# Altium PCB MainBoard.PcbDoc (part 2 of 2)
Units mm, origin at the board's own origin, x right, y up, seen from the top; angles counter-clockwise.
Board outline 250 x 90 mm, 2 copper layers (Top Layer, Bottom Layer); 239 components, 149 nets, 765 pads, 496 vias.
Unrouted connection lines stored in the file: 4.
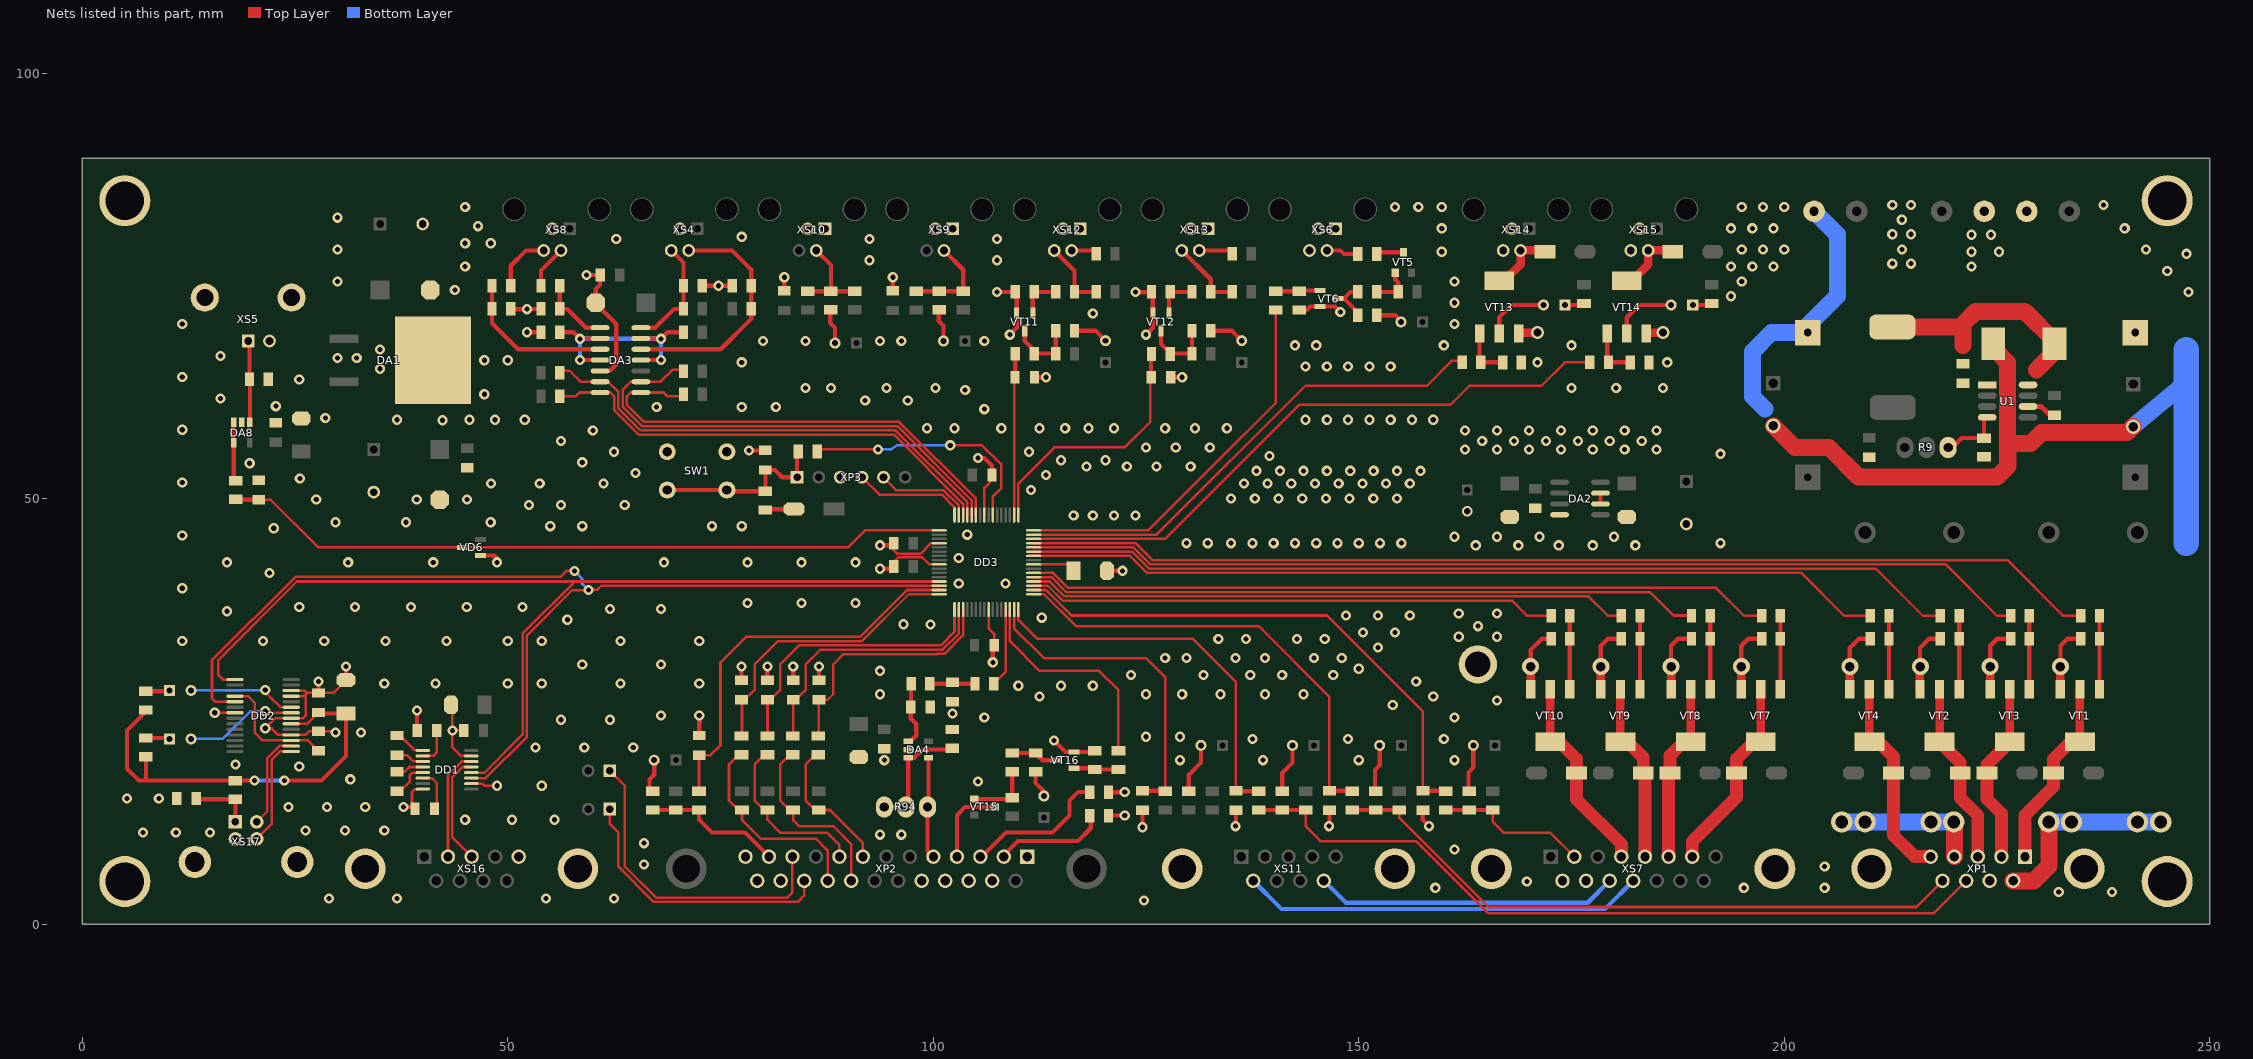
[diagram p2: the nets of this part, all layers, seen from the top]

## Via types
v1: diameter 1.2, hole 0.6, Top Layer to Bottom Layer, 463 vias
v2: diameter 2, hole 1.1, Top Layer to Bottom Layer, 19 vias
v3: diameter 2.5, hole 1.5, Top Layer to Bottom Layer, 9 vias
v4: diameter 1.5, hole 0.9, Top Layer to Bottom Layer, 2 vias
v5: diameter 1.2, hole 0.711, Top Layer to Bottom Layer, 2 vias
v6: diameter 1.5, hole 0.8, Top Layer to Bottom Layer, 1 vias

## Nets (pads, with @x,y where several pads share a name; then routed paths per layer and width w, separated by ;. In a path a pad name is that pad's centre, name@x,y a point inside that pad or via, vN(x,y) a via of type N, cw(c..) or ccw(c..) an arc to the next point about the centre after c; other vN are vias at no path point) (continued)
GND: C1.2 C3.1 C4.2 C5.2 C6.2 C7.1 C8.1 C9.2 C10.1 C11.1 C12.2 C13.2 C14.1 C15.1 C16.2 C17.1 C18.2 C19.1 C20.1 C21.1 C22.1 C23.1 C24.1 C25.1 C26.1 C27.1 C29.1 C30.1 C32.1 C33.1 C34.1 C35.1 C36.1 C37.1 C38.1 C39.1 C40.1 C41.1 C42.1 C43.1 C44.2 C45.1 C46.1 C47.1 C48.1 C49.1 C50.1 C51.1 C52.1 C53.1 DA1.4 DA2.4 DA3.12 DA4.2 DA8.2 DD1.8 DD1.10 DD1.15 DD2.7 DD2.18 DD2.21 DD2.25 DD2.26 DD3.9 DD3.20 DD3.25 DD3.41 pad.1 pad.2@5.001,5.002 pad.3 pad.4 pad.6 R6.2 R12.1 R13.2 R20.2 R22.1 R24.1 R26.1 R28.1 R37.2 R38.2 R39.2 R51.2 R53.1 R55.1 R57.1 R59.1 R74.1 R75.1 R78.1 R79.1 R87.2 R92.2 R93.2 R95.2 SW1.1 SW1.3 U1.6 VD1.2 VD6.1 VT1.3 VT2.3 VT3.3 VT4.3 VT6.2 VT7.3 VT8.3 VT9.3 VT10.3 VT11.2 VT12.2 VT13.3 VT14.3 VT16.2 XP1.7 XP1.10 XP1.11 XP2.1 XP2.13 XP2.15 XP2.16 XP2.17 XP2.18 XP2.24 XP2.25 XP3.3 XS1.2 XS2.1 XS3.2 XS4.3 XS5.2 XS6.1 XS6.3 XS6.4 XS7.9 XS7.10 XS7.16 XS7.17 XS8.3 XS9.1 XS9.3 XS10.1 XS10.3 XS11.10 XS11.11 XS12.1 XS12.3 XS13.1 XS13.3 XS14.3 XS14.4 XS15.3 XS15.4 XS16.5 XS16.10 XS16.11 XS17.4 XS17.5 XS17.6 | length 364.6
  Top Layer w0.3: v1(15.576,24.827) DD2.7@17.951,24.827 ; v1@21.251,23.002 22.001,23.002 22.251,23.002 23.026,22.227 DD2.18@24.551,22.227 26.226,22.227 26.651,22.652 C53.1@27.751,22.652 29.601,22.652 v1(29.751,22.502) ; v1(21.501,23.002) 22.676,24.177 DD2.21@24.551,24.177 25.926,24.177 26.251,24.502 26.251,26.937 26.467,27.152 C50.1@27.751,27.152 ; DD2.25@24.551,26.777 26.026,26.777 26.401,27.152 ; DD2.26@24.551,27.427 26.126,27.427 26.401,27.152 ; C50.1@27.376,26.777 C50.1@27.751,27.152 ; C51.1@31.001,28.652 29.501,27.152 C50.1@27.751,27.152 ; C41.1@39.351,13.752 38.751,14.352 38.751,15.502 39.101,15.852 DD1.8@40.026,15.852 ; C32.1@43.501,25.352 v1(43.501,22.752) ; C29.1@44.851,22.752 v1(43.501,22.752) ; DD1.15@45.726,19.752 44.501,19.752 43.501,20.752 v1(43.501,22.752) ; 46.751,16.502 DD1.10@45.726,16.502 47.001,16.502 47.251,16.252 v1(48.751,16.252) ; C39.1@95.351,41.752 95.351,42.552 95.901,43.102 98.706,43.102 99.556,42.252 DD3.25@100.701,42.252 ; C37.1@95.351,44.752 95.351,43.952 95.801,43.502 98.493,43.502 99.743,44.752 DD3.20@100.701,44.752 ; DD3.9@106.001,48.052 106.001,51.252 107.151,52.402 C40.1@106.901,52.752 ; DD3.41@106.501,36.952 106.501,34.752 107.151,34.102 C38.1@107.151,32.752 ; 26.401,27.152 C50.1@27.751,27.152
  Top Layer w0.5: C50.1@27.751,27.152 v1(27.751,28.502) ; C51.1@31.001,28.652 v1(31.001,30.252) ; v1(37.751,13.752) 37.835,13.669 37.917,13.669 38.001,13.752 C41.1@39.351,13.752 ; C30.1@39.351,23.002 v1(39.351,25.102) ; VD6.1@46.801,43.302 48.451,43.302 v1@48.751,43.002 ; R37.2@50.351,72.28 50.378,72.252 v1(52.251,72.252) 52.223,72.28 R51.2@53.901,72.28 R51.2@53.888,72.267 ; v1(52.251,69.542) R13.2@53.901,69.542 ; v1(59.251,76.252) C20.1@60.851,76.252 60.851,75.102 60.351,74.602 C3.1@60.351,73.017 ; C3.1@60.351,73.217 C3.1@60.351,73.017 ; DA3.12@60.851,64.997 61.981,64.997 62.751,65.767 62.751,70.502 60.351,72.902 C3.1@60.351,73.017 ; C52.1@72.501,22.152 v1(72.501,24.502) ; R6.2@72.751,75.117 R6.2@72.851,75.017 R20.2@76.401,75.017 R20.2@76.501,75.117 ; C49.1@77.476,28.652 v1(77.476,30.252) ; v1(78.351,55.652) C44.2@80.251,55.652 ; C48.1@80.509,28.652 v1(80.509,30.252) ; C24.1@82.501,74.402 v1(82.501,76.002) ; C47.1@83.543,28.652 v1(83.543,30.252) ; C46.1@86.576,28.652 v1(86.576,30.252) ; v1(93.751,41.752) C39.1@95.351,41.752 ; v1(93.751,44.502) C37.1@95.601,44.502 ; C39.1@95.101,41.752 C39.1@95.351,41.752 ; C25.1@95.251,74.402 v1(95.251,76.002) ; v1(105.251,54.752) 106.001,54.752 106.901,53.852 C40.1@106.901,52.752 ; v1(107.001,30.752) 107.001,32.602 C38.1@107.151,32.752 ; v1(107.501,74.252) 107.526,74.277 R74.1@109.651,74.277 109.801,74.127 VT11.2@109.801,71.802 109.801,70.052 v1(109.001,69.252) ; C26.1@111.901,64.252 v1(113.251,64.252) ; v1(114.203,21.55) 115.551,20.202 VT16.2@116.551,20.202 118.826,20.202 R87.2@118.976,20.352 ; C36.1@120.401,41.502 v1(122.251,41.502) ; R92.2@120.601,12.727 120.626,12.752 v1(122.501,12.752) ; R93.2@120.601,15.477 122.476,15.477 v1(122.501,15.502) ; v1(123.751,74.252) 125.626,74.252 R75.1@125.651,74.277 125.801,74.127 VT12.2@125.801,71.802 125.801,70.052 v1(125.001,69.252) ; C33.1@124.576,13.352 124.576,11.402 v1(124.601,11.377) ; C27.1@127.901,64.252 v1(129.251,64.252) ; v1(135.501,11.502) 135.563,11.564 C8.1@135.563,13.352 ; R39.2@143.026,72.152 143.901,72.152 144.301,72.552 VT6.2@145.451,72.552 147.201,72.552 v1(147.835,71.918) ; v1(146.501,11.502) 146.549,11.551 C7.1@146.549,13.352 ; C23.1@157.536,13.352 157.536,12.217 v1(158.251,11.502) ; v2(170.201,30.252) 170.201,32.202 171.526,33.527 R59.1@172.601,33.527 ; v2(178.451,30.252) 178.451,32.702 179.276,33.527 R57.1@180.851,33.527 ; v2(186.701,30.252) 186.701,32.702 187.526,33.527 R55.1@189.101,33.527 ; v2(194.951,30.252) 194.951,32.702 195.776,33.527 R53.1@197.351,33.527 ; VT4.3@207.701,27.602 VT4.3@207.751,27.652 ; v2(207.701,30.252) 207.701,32.452 208.776,33.527 R28.1@210.101,33.527 ; VT2.3@215.951,27.602 VT2.3@216.001,27.652 ; v2@215.951,30.202 215.951,32.452 217.026,33.527 R24.1@218.351,33.527 ; v2(224.201,30.252) 224.201,32.702 225.026,33.527 R26.1@226.601,33.527 ; v2(232.451,30.252) 232.451,32.702 233.276,33.527 R22.1@234.851,33.527
  Top Layer w0.6: U1.6@228.651,60.817 230.186,60.817 231.201,59.802 C4.2@231.751,59.802
  Top Layer w1: VT13.3@168.801,69.402 168.901,69.502 v4(171.001,69.502) ; VT10.3@170.201,27.602 v2(170.201,30.252) ; VT9.3@178.451,27.602 v2(178.451,30.252) ; XS15.4@181.971,79.147 XS15.4@181.971,79.182 ; VT14.3@183.801,69.402 183.901,69.502 v4(185.751,69.502) ; VT8.3@186.701,27.602 v2(186.701,30.252) ; VT7.3@194.951,27.602 v2(194.951,30.252) ; VT4.3@207.701,27.602 v2(207.701,30.252) ; VT2.3@215.951,27.602 215.951,30.202 v2(216.001,30.252) ; VT3.3@224.201,27.602 v2(224.201,30.252) ; VT1.3@232.451,27.602 v2(232.451,30.252)
  Top Layer w2: C5.2@198.721,58.535 201.254,56.002 205.251,56.002 208.751,52.502 224.501,52.502 225.001,52.502 226.313,53.815 226.313,56.44 228.938,56.44 230.251,57.752 240.301,57.752 C1.2@241.001,58.452 ; VD1.2@224.751,67.502 226.251,66.002 226.251,54.252
  Bottom Layer w0.3: v1@15.501,24.752 v1(15.576,24.827)
  Bottom Layer w0.5: v1@37.751,13.502 v1(37.751,13.752) ; v1(39.351,25.102) v1@39.501,25.252 ; v1@78.251,55.752 v1(78.351,55.652)
  Bottom Layer w2: 197.751,60.502 196.251,62.002 196.251,67.252 198.501,69.502 pad.3@202.751,69.502 202.342,69.911 202.501,70.07 206.251,73.82 206.251,81.002 XS3.2@203.501,83.752 ; C1.2@241.001,58.452 247.251,63.702
  Bottom Layer w3: 247.251,44.752 247.251,63.702 247.251,67.502
  other v1: 124.751,2.752 29.001,3.002 37.001,3.002 54.501,3.002 62.501,3.002 232.251,3.752 238.501,3.752 159.001,4.252 195.251,4.252 204.751,4.252 169.751,5.002 204.751,6.752 66.001,7.002 161.251,8.752 66.001,9.502 93.751,10.502 96.251,10.502 7.137,10.752 11.001,10.752 15.001,10.752 26.251,11.002 30.876,11.002 35.501,11.002 45.001,12.252 50.501,12.252 55.501,12.252 24.251,13.752 28.751,13.752 33.251,13.752 5.251,14.752 9.001,14.752 54.001,16.252 105.251,16.752 31.501,17.002 25.501,18.502 18.001,18.752 94.251,19.252 129.001,19.252 138.751,19.252 150.001,19.252 161.251,19.252 53.251,20.752 59.001,20.752 64.751,20.752 137.501,21.752 148.751,21.752 160.001,21.752 125.001,22.002 129.001,22.002 32.751,22.502 56.251,24.002 62.001,24.002 106.001,24.252 161.251,24.252 68.001,24.502 102.251,24.752 154.001,25.752 166.251,26.252 112.501,26.752 158.751,26.752 93.751,27.002 125.001,27.002 129.251,27.002 133.751,27.002 139.001,27.002 143.501,27.002 110.001,28.002 115.001,28.002 118.751,28.002 35.501,28.252 41.501,28.252 50.001,28.252 54.001,28.252 63.251,28.252 72.501,28.252 156.751,28.502 123.251,29.252 131.751,29.252 137.251,29.252 141.001,29.252 147.001,29.252 93.751,29.752 150.001,30.002 58.751,30.502 68.001,30.502 127.251,31.252 129.751,31.252 135.501,31.252 139.001,31.252 144.751,31.252 148.001,31.252 152.251,32.502 11.751,33.252 21.251,33.252 28.438,33.252 35.626,33.252 42.813,33.252 50.001,33.252 54.001,33.252 63.251,33.252 72.501,33.252 133.501,33.502 136.751,33.502 142.751,33.502 146.001,33.502 161.751,33.752 166.251,33.752 150.501,34.252 154.251,34.252 164.001,35.002 99.67,35.204 96.52,35.23 57.001,35.752 112.751,36.002 148.501,36.252 152.251,36.252 156.001,36.252 161.751,36.502 166.251,36.502 17.001,36.752 62.001,37.002 68.001,37.002 25.501,37.252 32.063,37.252 38.626,37.252 45.188,37.252 51.751,37.252 78.188,37.719 84.522,37.719 90.856,37.719 11.751,39.461 103.001,40.002 108.501,40.002 22.001,41.252 17.001,42.502 31.251,42.502 41.251,42.502 48.751,42.502 68.376,42.502 78.188,42.502 84.522,42.502 90.856,42.502 103.001,43.002 163.751,44.502 168.751,44.502 173.501,44.502 177.501,44.502 182.501,44.502 129.751,44.752 132.251,44.752 135.001,44.752 137.501,44.752 140.001,44.752 142.501,44.752 145.001,44.752 147.501,44.752 150.001,44.752 152.501,44.752 155.001,44.752 192.501,44.752 161.251,45.502 166.251,45.502 171.251,45.502 180.001,45.502 11.751,45.669 104.001,45.752 22.501,46.502 55.001,46.752 58.751,46.752 74.001,46.752 77.501,46.752 29.76,47.212 38.04,47.212 47.997,47.212 116.501,48.002 118.751,48.002 121.251,48.002 123.751,48.002 52.501,49.252 56.251,49.252 63.751,49.252 27.501,49.879 39.31,49.879 45.228,49.879 135.001,50.002 137.787,50.002 140.572,50.002 143.358,50.002 146.144,50.002 148.93,50.002 151.715,50.002 154.501,50.002 111.501,51.002 48.048,51.752 53.751,51.752 61.251,51.752 136.501,51.752 139.287,51.752 142.072,51.752 144.858,51.752 147.644,51.752 150.43,51.752 153.215,51.752 156.001,51.752 11.751,51.877 25.569,52.368 113.251,52.752 65.001,53.002 138.001,53.252 140.751,53.252 143.501,53.252 146.251,53.252 149.001,53.252 151.751,53.252 154.501,53.252 157.251,53.252 118.001,53.752 122.751,53.752 126.251,53.752 130.251,53.752 19.676,54.146 58.751,54.252 115.001,54.502 120.251,54.502 139.501,55.002 192.501,55.252 62.501,55.502 111.251,55.502 162.501,55.752 166.251,55.752 170.001,55.752 173.751,55.752 177.501,55.752 181.251,55.752 185.001,55.752 125.001,56.002 128.501,56.002 132.501,56.002 56.251,56.752 164.501,56.752 168.251,56.752 172.001,56.752 175.751,56.752 179.501,56.752 183.251,56.752 60.001,58.002 162.501,58.002 166.251,58.002 170.001,58.002 173.751,58.002 177.501,58.002 181.251,58.002 185.001,58.002 11.751,58.086 99.251,58.252 102.501,58.252 108.001,58.252 112.501,58.252 115.501,58.252 118.251,58.252 121.251,58.252 127.251,58.252 130.751,58.252 134.501,58.252 42.333,59.201 37.001,59.252 45.501,59.252 48.501,59.252 52.001,59.252 143.751,59.252 146.251,59.252 148.751,59.252 151.251,59.252 153.751,59.252 156.251,59.252 158.751,59.252 28.566,59.455 106.001,60.502 67.501,60.752 77.501,60.752 81.501,60.752 22.749,60.852 92.001,61.502 97.001,61.502 16.251,61.752 47.251,62.252 103.751,62.752 85.001,63.002 88.001,63.002 94.501,63.002 100.251,63.002 175.001,63.002 180.251,63.002 185.751,63.002 25.501,64.002 11.751,64.294 35.001,65.252 143.751,65.502 146.251,65.502 148.751,65.502 151.251,65.502 153.751,65.502 77.501,66.002 171.001,66.002 186.251,66.002 47.251,66.252 50.001,66.252 30.001,66.502 32.251,66.502 16.251,66.752 35.001,67.502 142.501,68.002 145.001,68.002 160.001,68.002 175.001,68.002 80.001,68.502 85.001,68.502 93.751,68.502 96.251,68.502 106.001,68.502 11.751,70.502 161.251,70.502 118.751,71.752 161.251,73.002 193.751,73.767 247.501,74.252 43.781,74.492 74.751,75.002 30.001,75.502 161.251,75.502 195.001,75.502 245.001,76.752 45.001,77.252 193.751,77.252 196.251,77.252 198.751,77.252 222.001,77.252 212.7,77.597 214.884,77.597 92.501,78.002 107.501,78.002 247.251,78.752 159.751,79.002 222.001,79.002 225.251,79.002 30.001,79.252 195.001,79.252 197.501,79.252 200.001,79.252 213.843,79.248 242.501,79.252 45.001,80.002 48.001,80.002 62.751,80.502 92.501,80.502 107.501,80.502 77.501,80.752 222.001,81.001 224.282,81.001 212.7,81.051 214.884,81.051 159.751,81.752 193.751,81.752 196.251,81.752 198.751,81.752 240.001,81.752 46.501,82.002 213.817,82.753 30.001,83.002 45.001,84.252 154.251,84.252 157.001,84.252 159.751,84.252 195.001,84.252 197.501,84.252 200.001,84.252 212.7,84.506 214.884,84.506 237.501,84.502
M\C\L\R\: C44.1 R90.1 R91.1 SW1.2 SW1.4 XP3.1 | length 21.3
  Top Layer w0.5: SW1.2@68.751,51.002 SW1.4@75.751,51.002 75.901,50.852 R91.1@80.276,50.852 80.276,53.327 C44.1@80.251,53.352 81.401,53.352 82.251,52.502 XP3.1@84.001,52.502 84.001,55.377 R90.1@84.151,55.527
NetBLM1_1: BLM1.1 C45.2 XS17.1 | length 7.3
  Top Layer w0.5: C45.2@13.401,14.752 13.501,14.652 BLM1.1@17.976,14.652 18.001,14.627 XS17.1@18.001,12.002
NetC2_1: C2.1 L1.1 U1.8 VD1.1 | length 27.9
  Top Layer w2: L1.1@212.701,70.152 221.001,70.152 ; 221.001,68.002 221.001,70.152 ; 229.626,65.127 231.751,67.252 VD1.1@231.751,68.202 231.751,68.502 228.251,72.002 222.501,72.002 221.001,70.502 221.001,70.152
NetC2_2: C2.2 U1.1
NetC28_1: C28.1 DD1.3 | length 3.3
  Top Layer w0.3: C28.1@37.001,19.852 38.151,19.852 38.901,19.102 DD1.3@40.026,19.102
NetC28_2: C28.2 DD1.1 | length 3.7
  Top Layer w0.3: C28.2@37.001,22.152 37.351,22.152 39.101,20.402 DD1.1@40.026,20.402
NetC30_2: C30.2 DD1.2 | length 4.6
  Top Layer w0.3: DD1.2@40.026,19.752 41.251,19.752 41.651,20.152 C30.2@41.651,23.002
NetC31_1: C31.1 DD1.5 | length 4.4
  Top Layer w0.3: C31.1@37.001,15.602 37.351,15.602 38.501,16.752 38.501,17.502 38.801,17.802 DD1.5@40.026,17.802
NetC31_2: C31.2 DD1.4 | length 3.3
  Top Layer w0.3: C31.2@37.001,17.902 37.901,17.902 38.451,18.452 DD1.4@40.026,18.452
NetC36_2: C36.2 DD3.56 | length 5
  Top Layer w0.3: DD3.56@111.801,42.252 115.751,42.252 C36.2@116.501,41.502
NetC41_2: C41.2 DD1.6 | length 5
  Top Layer w0.3: DD1.6@40.026,17.152 41.101,17.152 41.651,16.602 C41.2@41.651,13.502
NetC42_2: C42.2 R88.2 R89.1 | length 5.4
  Top Layer w0.5: R89.1@99.601,28.227 102.076,28.227 C42.2@102.251,28.402 102.426,28.227 R88.2@104.901,28.227
NetC43_2: C43.2 DA4.1 R89.2 | length 7.4
  Top Layer w0.5: DA4.1@97.301,21.452 98.001,22.152 98.001,23.502 97.351,24.152 C43.2@97.351,25.502 97.401,25.552 R89.2@97.401,28.227
NetC53_2: C53.2 DD2.4 DD2.17 | length 14.5
  Top Layer w0.3: DD2.4@17.951,26.777 19.476,26.777 20.251,26.002 20.251,22.502 21.176,21.577 DD2.17@24.551,21.577 26.526,21.577 C53.2@27.751,20.352
NetDA2_6: DA2.6 DA2.7 | length 1.3
  Top Layer w0.5: DA2.6@178.401,49.367 DA2.7@178.401,50.637
NetDA3_4: DA3.4 DA3.6 DA3.9 DA3.11 R11.1 R13.1 | length 29.6
  Top Layer w0.5: R13.1@56.101,69.542 57.726,69.542 v1(58.501,68.767) 58.541,68.807 DA3.9@60.851,68.807 ; v1(58.501,66.267) DA3.11@60.851,66.267 ; DA3.4@65.651,66.267 v1(68.001,66.267) ; DA3.6@65.651,68.807 67.961,68.807 v1(68.001,68.767) 68.776,69.542 R11.1@70.651,69.542
  Bottom Layer w0.5: v1(58.501,66.267) v1(58.501,68.767) v1(68.001,68.767) v1(68.001,66.267)
NetDA4_3: DA4.3 R94.1 R94.2 R95.1 | length 14.1
  Top Layer w0.5: R94.2@96.791,13.752 97.051,14.012 DA4.3@97.051,19.552 97.801,19.552 98.751,20.502 102.076,20.502 R95.1@102.226,20.652
  Bottom Layer w0.5: R94.1@94.251,13.752 R94.2@96.791,13.752
NetDA8_1: DA8.1 R38.1 XS5.1 | length 9.6
  Top Layer w0.5: XS5.1@19.501,68.502 19.651,68.352 R38.1@19.651,64.027 19.701,63.977 DA8.1@19.701,58.952
NetDA8_3: DA8.3 DA8.4 R34.1 | length 6.9
  Top Layer w0.5: DA8.3@17.801,58.952 DA8.4@17.801,56.552 17.801,52.327 R34.1@18.026,52.102
NetDD1_13: DD1.13 XS16.3 | length 13
  Top Layer w0.3: DD1.13@45.726,18.452 44.701,18.452 43.501,17.252 43.501,10.172 XS16.3@45.751,7.922
NetDD1_14: DD1.14 XS16.2 | length 13
  Top Layer w0.3: XS16.2@42.981,7.922 42.981,17.482 44.601,19.102 DD1.14@45.726,19.102
NetDD2_15: DD2.15 XS17.3 | length 12.7
  Top Layer w0.3: XS17.3@20.501,10.002 22.251,11.752 22.251,19.295 23.233,20.277 DD2.15@24.551,20.277
NetDD2_16: DD2.16 XS17.2 | length 11.4
  Top Layer w0.3: XS17.2@20.501,12.002 21.751,13.252 21.751,19.502 23.176,20.927 DD2.16@24.551,20.927
NetDD2_22: DD2.22 HL13.2 | length 13.6
  Top Layer w0.3: v1@21.501,25.252 v1(21.501,25.002) 21.676,24.827 DD2.22@24.551,24.827
  Bottom Layer w0.3: HL13.2@12.791,21.752 16.501,21.752 19.751,25.002 21.001,25.002 21.251,25.252 v1(21.501,25.002)
NetDD2_23: DD2.23 HL14.2 | length 12.9
  Top Layer w0.3: v1(21.501,27.502) 21.501,27.002 21.751,27.002 22.251,26.502 23.276,25.477 DD2.23@24.551,25.477
  Bottom Layer w0.3: HL14.2@12.791,27.451 21.449,27.451 v1(21.501,27.502)
NetHL1_2: HL1.2 R2.1 | length 5.7
  Top Layer w0.5: R2.1@151.993,15.602 151.901,15.694 151.901,18.109 152.461,18.669 HL1.2@152.461,21.002
NetHL2_2: HL2.2 R8.1 | length 5.9
  Top Layer w0.5: R8.1@141.006,15.602 141.006,17.757 142.211,18.962 HL2.2@142.211,21.002
NetHL3_2: HL3.2 R33.2 | length 3.4
  Top Layer w0.5: R33.2@152.101,71.527 154.304,71.527 154.681,71.15 HL3.2@154.681,70.472
NetHL4_2: HL4.2 R41.1 | length 5.7
  Top Layer w0.5: R41.1@162.979,15.602 162.901,15.681 162.901,17.816 163.461,18.376 HL4.2@163.461,21.002
NetHL5_2: HL5.2 R46.1 | length 3.9
  Top Layer w0.5: R46.1@87.976,71.902 87.901,71.827 87.901,70.62 88.461,70.06 HL5.2@88.461,68.252
NetHL6_2: HL6.2 R48.1 | length 3.9
  Top Layer w0.5: R48.1@100.726,72.152 100.651,72.077 100.651,70.85 101.211,70.29 HL6.2@101.211,68.502
NetHL7_2: HL7.2 R60.1 | length 4.1
  Top Layer w0.5: R60.1@116.601,69.727 119.066,69.727 HL7.2@120.251,68.542
NetHL8_2: HL8.2 R61.1 | length 4.1
  Top Layer w0.5: R61.1@132.601,69.727 135.066,69.727 HL8.2@136.251,68.542
NetHL9_1: HL9.1 R72.1 | length 2.3
  Top Layer w0.5: HL9.1@174.251,72.752 176.376,72.752 R72.1@176.476,72.652
NetHL9_2: HL9.2 VD11.2 VT13.2 VT13.4 XS14.2 | length 16.2
  Top Layer w0.5: VT13.2@166.501,69.402 166.501,71.252 168.001,72.752 HL9.2@171.711,72.752 ; XS14.2@169.001,79.002 169.011,79.002 XS14.2@169.156,79.002
  Top Layer w1: VT13.4@166.501,75.602 167.101,75.602 169.011,77.512 169.011,79.002 XS14.2@169.011,79.147 ; XS14.2@169.156,79.002 XS14.2@169.011,79.147 ; VD11.2@172.151,79.002 172.006,79.147 XS14.2@169.011,79.147
NetHL10_1: HL10.1 R73.1 | length 2.3
  Top Layer w0.5: HL10.1@189.251,72.752 191.376,72.752 R73.1@191.476,72.652
NetHL10_2: HL10.2 VD12.2 VT14.2 VT14.4 XS15.2 | length 16.9
  Top Layer w0.5: VT14.2@181.501,69.402 181.501,71.252 183.001,72.752 HL10.2@186.711,72.752 ; VT14.4@181.501,75.602 VT14.4@182.276,74.827
  Top Layer w1: VT14.4@181.501,75.602 182.101,75.602 184.011,77.512 XS15.2@184.011,79.147 187.006,79.147 VD12.2@187.151,79.002
NetHL11_2: HL11.2 R83.1 | length 6
  Top Layer w0.5: R83.1@130.019,15.602 130.019,17.521 131.461,18.962 HL11.2@131.461,21.002
NetHL12_2: HL12.2 R84.2 | length 2.7
  Top Layer w0.5: R84.2@112.026,17.902 112.026,16.577 HL12.2@113.001,15.602
NetHL13_1: HL13.1 R96.2 | length 2.8
  Top Layer w0.5: R96.2@7.476,21.852 10.151,21.852 HL13.1@10.251,21.752
NetHL14_1: HL14.1 R97.2 | length 2.8
  Top Layer w0.5: R97.2@7.476,27.352 10.151,27.352 HL14.1@10.251,27.252
NetHL15_2: HL15.2 R105.1 | length 4
  Top Layer w0.5: R105.1@67.026,15.602 66.651,15.977 66.651,16.994 67.211,17.554 HL15.2@67.211,19.252
NetJP1_1: JP1.1 XP2.11 | length 37.7
  Top Layer w0.3: JP1.1@62.001,18.002 63.751,16.252 63.751,6.752 67.401,3.102 82.851,3.102 83.457,3.708 XP2.11@83.457,7.922
NetJP2_1: JP2.1 XP2.23 | length 32.8
  Top Layer w0.3: JP2.1@62.001,13.502 62.001,11.752 63.001,10.752 63.001,6.752 67.151,2.602 84.101,2.602 84.837,3.339 XP2.23@84.837,5.082
NetR9_1: R9.1 R12.2 U1.4 | length 7.4
  Top Layer w0.5: R9.1@219.251,56.002 219.751,56.002 220.851,57.102 R12.2@223.476,57.102 223.476,59.172 U1.4@223.851,59.547 U1.4@223.901,59.497
NetR21_1: R21.1 R22.2 VT1.1 | length 8.6
  Top Layer w0.5: VT1.1@237.051,27.602 R21.1@237.051,36.227
NetR23_2: R23.2 R24.2 VT2.1 | length 8.6
  Top Layer w0.5: VT2.1@220.551,27.602 R23.2@220.551,36.227
NetR25_2: R25.2 R26.2 VT3.1 | length 8.7
  Top Layer w0.5: VT3.1@228.801,27.602 R25.2@228.801,36.252
NetR27_2: R27.2 R28.2 VT4.1 | length 8.7
  Top Layer w0.5: VT4.1@212.301,27.602 R27.2@212.301,36.252
NetR29_1: R29.1 R30.2 VT5.1 | length 5
  Top Layer w0.5: R30.2@152.101,74.277 R29.1@154.651,74.277 154.651,75.352 154.301,75.702 VT5.1@154.301,76.552
NetR30_1: R30.1 R33.1 VT6.3 | length 5.3
  Top Layer w0.5: VT6.3@147.551,73.502 148.251,73.502 ; R33.1@149.901,71.527 149.901,71.852 148.251,73.502 ; R30.1@149.901,74.277 149.026,74.277 148.251,73.502
NetR35_1: R35.1 VT5.3 | length 3.2
  Top Layer w0.5: R35.1@152.101,78.727 152.326,78.952 VT5.3@155.251,78.952
NetR35_2: R35.2 XS6.2 | length 3.8
  Top Layer w0.5: XS6.2@146.261,79.147 147.856,79.147 148.276,78.727 R35.2@149.901,78.727
NetR36_2: R36.2 R39.1 VT6.1 | length 5.3
  Top Layer w0.5: R36.2@140.226,74.352 R39.1@143.026,74.352 143.126,74.452 VT6.1@145.451,74.452
NetR45_1: R45.1 R46.2 R49.1 XS10.2 | length 11
  Top Layer w0.5: R49.1@85.276,74.352 85.291,74.367 R46.2@87.976,74.367 ; XS10.2@86.261,79.147 87.976,77.432 R46.2@87.976,74.367 ; R45.1@90.776,74.367 R46.2@87.976,74.367
NetR47_1: R47.1 R48.2 R50.1 XS9.2 | length 11
  Top Layer w0.5: R50.1@98.026,74.352 R48.2@100.501,74.352 ; R48.2@100.726,74.367 R47.1@103.526,74.367 103.526,76.882 XS9.2@101.261,79.147
NetR52_2: R52.2 R53.2 VT7.1 | length 8.7
  Top Layer w0.5: VT7.1@199.551,27.602 R52.2@199.551,36.252
NetR54_2: R54.2 R55.2 VT8.1 | length 8.6
  Top Layer w0.5: VT8.1@191.301,27.602 R54.2@191.301,36.227
NetR56_2: R56.2 R57.2 VT9.1 | length 8.6
  Top Layer w0.5: VT9.1@183.051,27.602 R56.2@183.051,36.252
NetR58_2: R58.2 R59.2 VT10.1 | length 8.6
  Top Layer w0.5: VT10.1@174.801,27.602 R58.2@174.801,36.252
NetR60_2: R60.2 R62.2 R63.1 VT11.3 | length 8.4
  Top Layer w0.5: VT11.3@110.751,69.702 110.751,68.502 112.039,67.215 R62.2@111.851,67.027 R63.1@114.401,67.027 ; R63.1@114.401,67.477 R60.2@114.401,70.027
NetR61_2: R61.2 R64.1 R65.1 VT12.3 | length 8.4
  Top Layer w0.5: VT12.3@126.751,69.702 126.751,68.177 127.901,67.027 R65.1@130.401,67.027 R61.2@130.401,69.727
NetR66_1: R66.1 R70.2 XS12.4 | length 8.4
  Top Layer w0.5: XS12.4@114.221,79.147 116.601,76.767 R70.2@116.601,74.277 R66.1@119.151,74.277
NetR67_1: R67.1 XS12.2 | length 3
  Top Layer w0.5: XS12.2@116.261,79.147 118.781,79.147 R67.1@119.151,78.777
NetR68_1: R68.1 R71.2 XS13.4 | length 8.8
  Top Layer w0.5: XS13.4@129.221,79.147 132.601,75.767 R71.2@132.601,74.277 R68.1@135.151,74.277
NetR69_1: R69.1 XS13.2 | length 4
  Top Layer w0.5: XS13.2@131.261,79.147 134.781,79.147 R69.1@135.151,78.777
NetR70_1: R70.1 R74.2 VT11.1 | length 5.1
  Top Layer w0.5: VT11.1@111.701,71.802 111.701,74.127 R74.2@111.851,74.277 R70.1@114.401,74.277
NetR71_1: R71.1 R75.2 VT12.1 | length 5.1
  Top Layer w0.5: VT12.1@127.701,71.802 127.701,74.127 R75.2@127.851,74.277 R71.1@130.401,74.277
NetR76_2: R76.2 R78.2 VT13.1 | length 6
  Top Layer w0.5: VT13.1@164.201,69.402 164.201,66.177 R76.2@164.351,66.027 166.851,66.027 R78.2@166.901,65.977
NetR77_2: R77.2 R79.2 VT14.1 | length 6
  Top Layer w0.5: VT14.1@179.201,69.402 179.201,66.177 R77.2@179.351,66.027 181.851,66.027 R79.2@181.901,65.977
NetR80_1: R80.1 R81.2 VT15.1 | length 7.6
  Top Layer w0.5: VT15.1@104.801,14.702 109.126,14.702 R80.1@109.276,14.852 R81.2@109.276,17.902
NetR81_1: R81.1 R84.1 VT16.3 | length 5.5
  Top Layer w0.5: R81.1@109.276,20.102 R84.1@112.026,20.102 112.876,19.252 VT16.3@114.451,19.252
NetR86_2: R86.2 R87.1 VT16.1 | length 5.3
  Top Layer w0.5: VT16.1@116.551,18.302 118.826,18.302 R87.1@118.976,18.152 R86.2@121.776,18.152
NetR91_2: R91.2 VD13.1 | length 3.4
  Top Layer w0.5: R91.2@80.276,48.652 80.376,48.752 VD13.1@83.651,48.752
NetR98_2: R98.2 R102.1 XP2.8 | length 16.6
  Top Layer w0.3: R102.1@86.476,19.902 86.151,19.902 85.001,18.752 85.001,14.502 86.101,13.402 R98.2@86.526,13.402 87.851,13.402 91.74,9.513 XP2.8@91.74,7.922
NetR99_2: R99.2 R103.1 XP2.21 | length 21.3
  Top Layer w0.3: R99.2@83.101,13.402 82.001,14.502 82.001,18.752 83.151,19.902 R103.1@83.526,19.902 ; R99.2@83.526,13.402 83.526,12.227 84.251,11.502 88.251,11.502 90.359,9.394 XP2.21@90.359,5.082
NetR100_2: R100.2 R106.1 XP2.9 | length 19.5
  Top Layer w0.3: R106.1@80.001,19.752 79.001,18.752 79.001,14.502 R100.2@80.101,13.402 ; R100.2@80.501,13.502 80.501,12.252 82.001,10.752 87.501,10.752 88.979,9.274 XP2.9@88.979,7.922
NetR101_2: R101.2 R107.1 XP2.22 | length 24.1
  Top Layer w0.3: R101.2@77.101,13.402 76.001,14.502 76.001,18.752 77.151,19.902 R107.1@77.526,19.902 ; R101.2@77.526,13.402 77.526,12.227 79.751,10.002 86.251,10.002 87.598,8.655 XP2.22@87.598,5.082
NetXS7_11: XS7.11 XS11.9 | length 35.7
  Bottom Layer w0.5: XS11.9@145.906,5.082 148.486,2.502 176.901,2.502 XS7.11@179.481,5.082
NetXS7_12: XS7.12 XS11.6 | length 47.4
  Bottom Layer w0.5: XS11.6@137.596,5.082 140.926,1.752 178.921,1.752 XS7.12@182.251,5.082
OPTO1: C26.2 DD3.2 R62.1 | length 19
  Top Layer w0.3: DD3.2@109.501,48.052 109.501,64.252 C26.2@109.651,64.402
  Top Layer w0.5: C26.2@109.651,64.402 R62.1@109.651,67.027
OPTO2: C27.2 DD3.1 R64.2 | length 30.2
  Top Layer w0.3: DD3.1@110.001,48.052 110.001,51.752 114.251,56.002 122.501,56.002 125.501,59.002 C27.2@125.501,64.252 ; R64.2@125.601,66.927 R64.2@125.651,66.977
  Top Layer w0.5: C27.2@125.601,64.252 R64.2@125.601,66.927
P_G_MAX: DA3.10 R32.1 R37.1 | length 18.4
  Top Layer w0.5: R32.1@48.151,75.017 R37.1@48.151,72.28 48.151,70.602 51.216,67.537 DA3.10@60.851,67.537
P_G_MAX_P_2: R32.2 XS8.4 | length 6.9
  Top Layer w0.5: R32.2@50.351,75.017 50.351,77.352 52.146,79.147 XS8.4@54.221,79.147
P_G_MIN: DA3.8 R43.1 R51.1 | length 8.4
  Top Layer w0.5: R43.1@56.101,75.017 R51.1@56.101,72.28 56.113,72.267 56.986,72.267 59.176,70.077 DA3.8@60.851,70.077
P_G_MIN_P_1: R43.2 XS8.2 | length 5.1
  Top Layer w0.5: R43.2@53.901,75.017 53.901,76.787 XS8.2@56.261,79.147
PGC: DD3.15 XP3.5 | length 11.3
  Top Layer w0.3: XP3.5@94.161,52.502 95.7,50.963 101.212,50.963 103.001,49.174 DD3.15@103.001,48.052
PGD: DD3.16 XP3.4 | length 13.3
  Top Layer w0.3: XP3.4@91.621,52.502 93.66,50.463 101.005,50.463 102.501,48.967 DD3.16@102.501,48.052
PHA: DD3.61 R21.2 | length 126.6
  Top Layer w0.3: DD3.61@111.801,44.752 123.751,44.752 125.751,42.752 226.251,42.752 232.776,36.227 R21.2@234.851,36.227
PHA_PMT: DD3.51 R58.1 | length 62.3
  Top Layer w0.3: DD3.51@111.801,39.752 113.458,39.752 115.208,38.002 168.001,38.002 169.776,36.227 R58.1@172.601,36.227
PHASE_A: VD7.2 VT7.2 VT7.4 XS7.7 | length 23.5
  Top Layer w1: VT7.4@197.251,21.402 VT7.2@197.251,27.602
  Top Layer w1.5: XS7.7@189.176,7.922 189.176,9.677 194.401,14.902 VD7.2@194.401,17.752 194.401,19.402 196.401,21.402 VT7.4@197.251,21.402
PHASE_B: VD8.2 VT8.2 VT8.4 XS7.6 | length 21.3
  Top Layer w1: VT8.4@189.001,21.402 VT8.2@189.001,27.602
  Top Layer w1.5: XS7.6@186.406,7.922 186.406,17.591 VD8.2@186.568,17.752 186.568,19.819 188.151,21.402 VT8.4@189.001,21.402
PHASE_C: VD9.2 VT9.2 VT9.4 XS7.5 | length 21.4
  Top Layer w1: VT9.4@180.751,21.402 VT9.2@180.751,27.602
  Top Layer w1.5: VT9.4@180.751,21.402 181.601,21.402 183.434,19.569 VD9.2@183.434,17.752 183.636,17.551 XS7.5@183.636,7.922
PHASE_D: VD10.2 VT10.2 VT10.4 XS7.4 | length 23.8
  Top Layer w1: VT10.4@172.501,21.402 VT10.2@172.501,27.602
  Top Layer w1.5: VT10.4@172.501,21.402 173.601,21.402 175.601,19.402 VD10.2@175.601,17.752 175.601,14.652 180.866,9.387 XS7.4@180.866,7.922
PHB: DD3.60 R25.1 | length 118.1
  Top Layer w0.3: DD3.60@111.801,44.252 123.544,44.252 125.544,42.252 219.001,42.252 225.026,36.227 R25.1@226.601,36.227
PHB_PMT: DD3.52 R56.1 | length 70.7
  Top Layer w0.3: DD3.52@111.801,40.252 113.665,40.252 115.415,38.502 177.001,38.502 179.276,36.227 R56.1@180.851,36.227
PHC: DD3.59 R23.1 | length 109.7
  Top Layer w0.3: DD3.59@111.801,43.752 123.337,43.752 125.337,41.752 210.751,41.752 216.276,36.227 R23.1@218.351,36.227
PHC_PMT: DD3.53 R54.1 | length 79.2
  Top Layer w0.3: DD3.53@111.801,40.752 113.872,40.752 115.622,39.002 184.251,39.002 187.001,36.252 189.076,36.252 R54.1@189.101,36.227
PHD: DD3.58 R27.1 | length 101.2
  Top Layer w0.3: DD3.58@111.801,43.252 123.13,43.252 125.13,41.252 202.001,41.252 207.026,36.227 R27.1@210.101,36.227
PHD_PMT: DD3.54 R52.1 | length 87.6
  Top Layer w0.3: DD3.54@111.801,41.252 114.079,41.252 115.829,39.502 192.001,39.502 195.276,36.227 R52.1@197.351,36.227
PLASM_GAS_MAX: DA3.13 DD3.13 R31.2 | length 56.8
  Top Layer w0.3: R31.2@56.203,65.017 57.236,65.017 58.526,63.727 DA3.13@60.851,63.727 ; DA3.13@60.891,63.767 61.751,63.767 63.001,62.517 63.001,60.588 65.587,58.002 95.587,58.002 104.001,49.588 DD3.13@104.001,48.052
PLASM_GAS_MIN: DA3.14 DD3.14 R42.2 | length 55.3
  Top Layer w0.3: R42.2@56.101,61.992 57.976,61.992 58.441,62.457 DA3.14@60.851,62.457 62.046,62.457 62.501,62.002 62.501,60.381 65.38,57.502 95.38,57.502 103.501,49.381 DD3.14@103.501,48.052
PMT_SENSOR: C22.2 DD3.17 R34.2 VD6.3 | length 85.8
  Top Layer w0.3: C22.2@20.751,49.852 22.151,49.852 27.751,44.252 VD6.3@44.701,44.252 90.001,44.252 92.001,46.252 DD3.17@100.701,46.252
  Top Layer w0.5: R34.2@18.026,49.902 18.076,49.852 C22.2@20.751,49.852
PMT_TRAILER: C23.2 DD3.50 R44.2 | length 63.7
  Top Layer w0.3: DD3.50@111.801,39.252 113.251,39.252 116.251,36.252 146.251,36.252 157.536,24.967 C23.2@157.536,15.652
  Top Layer w0.5: C23.2@157.536,15.652 160.183,15.652 R44.2@160.233,15.602
READY_STATE_CON: R104.1 R105.2 R108.1 XP2.12 | length 16.7
  Top Layer w0.5: R105.2@66.976,13.402 R104.1@69.776,13.402 ; R104.1@69.726,13.402 R108.1@72.476,13.402 72.476,12.277 74.001,10.752 77.866,10.752 XP2.12@80.696,7.922
RESET: DD3.7 R90.2 | length 29.4
  Top Layer w0.3: R90.2@86.351,55.777 v1(93.501,55.777) ; v1(102.001,56.252) 105.751,56.252 108.001,54.002 108.001,51.252 107.001,50.252 DD3.7@107.001,48.052
  Bottom Layer w0.3: v1(93.501,55.777) 94.976,55.777 95.001,55.752 95.751,56.252 v1(102.001,56.252) v1@101.751,56.252
RX_FTDI: DD1.12 DD2.1 DD3.29 | length 120.9
  Top Layer w0.3: DD2.1@17.951,28.727 16.526,28.727 16.001,29.252 16.001,31.045 25.208,40.252 DD3.29@100.701,40.252 ; DD1.12@45.726,17.802 47.301,17.802 51.751,22.252 51.751,34.119 57.884,40.252 57.912,40.252
SM1150_ALARM_STATE: C33.2 DD3.47 R85.2 | length 38.5
  Top Layer w0.3: DD3.47@109.501,36.752 109.501,34.752 113.001,31.252 125.001,31.252 127.251,29.002 127.251,15.752 R85.2@126.976,15.477 ; R85.2@127.223,15.652 R85.2@127.273,15.602
  Top Layer w0.5: C33.2@124.576,15.652 R85.2@127.223,15.652
SM1150_BIT0: C46.2 DD3.35 R102.2 | length 29.6
  Top Layer w0.3: C46.2@86.401,26.352 C46.2@86.576,26.352 ; R102.2@86.526,22.102 86.526,26.302 C46.2@86.576,26.352 ; DD3.35@103.501,36.952 103.501,33.939 101.315,31.752 100.434,31.752 100.406,31.725 89.473,31.725 88.251,30.502 88.251,27.002 87.601,26.352 C46.2@86.576,26.352
SM1150_BIT1: C47.2 DD3.34 R103.2 | length 31.9
  Top Layer w0.3: C47.2@83.151,26.352 C47.2@83.543,26.352 ; R103.2@83.526,22.102 83.526,26.336 C47.2@83.543,26.352 ; DD3.34@103.001,36.952 103.001,34.146 101.108,32.252 100.223,32.252 100.195,32.225 86.723,32.225 85.001,30.502 85.001,27.502 83.851,26.352 C47.2@83.543,26.352
SM1150_BIT2: C48.2 DD3.33 R106.2 | length 34.3
  Top Layer w0.3: C48.2@80.151,26.352 C48.2@80.509,26.352 ; R106.2@80.526,22.102 80.526,26.336 C48.2@80.509,26.352 ; DD3.33@102.501,36.952 102.501,34.353 100.901,32.752 84.251,32.752 82.001,30.502 82.001,27.502 80.851,26.352 C48.2@80.509,26.352
SM1150_BIT3: C49.2 DD3.32 R107.2 | length 34.7
  Top Layer w0.3: C49.2@77.151,26.352 C49.2@77.476,26.352 ; R107.2@77.526,22.102 77.526,26.302 C49.2@77.476,26.352 ; DD3.32@100.701,38.752 97.122,38.752 91.622,33.252 81.751,33.252 79.001,30.502 79.001,27.502 77.851,26.352 C49.2@77.476,26.352
SM1150_ON_OFF: DD3.46 R86.1 | length 25.6
  Top Layer w0.3: DD3.46@109.001,36.752 109.001,33.252 112.501,29.752 119.501,29.752 121.751,27.502 R86.1@121.751,20.502
SM1150_READY_STATE: C52.2 DD3.31 R108.2 | length 46.3
  Top Layer w0.3: C52.2@72.401,19.852 C52.2@72.501,19.852 ; R108.2@72.476,15.602 72.476,19.827 C52.2@72.501,19.852 ; DD3.31@100.701,39.252 96.914,39.252 91.414,33.752 78.001,33.752 75.001,30.752 75.001,21.002 73.851,19.852 C52.2@72.501,19.852
SM1150_SET_POWER: DD3.45 R88.1 | length 9.3
  Top Layer w0.3: R88.1@107.101,28.227 108.501,29.627 DD3.45@108.501,36.952
SM_END_TRAILER: C7.2 DD3.49 R4.2 | length 53.5
  Top Layer w0.3: DD3.49@111.801,38.752 113.001,38.752 116.751,35.002 138.251,35.002 146.549,26.704 C7.2@146.549,15.652
  Top Layer w0.5: C7.2@146.549,15.652 149.196,15.652 R4.2@149.246,15.602
SM_MONITOR_1_CON: R92.1 XP2.2 | length 13.2
  Top Layer w0.5: XP2.2@108.306,7.922 108.306,8.107 109.951,9.752 117.001,9.752 118.501,11.252 R92.1@118.501,12.752
SM_MONITOR_2_CON: R93.1 XP2.3 | length 16.9
  Top Layer w0.5: XP2.3@105.545,7.922 105.716,7.922 108.546,10.752 114.001,10.752 116.001,12.752 116.001,14.502 117.001,15.502 R93.1@118.251,15.502
SM_ON_OFF_CON: VT15.3 XP2.4 | length 9.7
  Top Layer w0.5: XP2.4@102.784,7.922 102.784,12.785 103.751,13.752 VT15.3@107.201,13.752
SM_SET_POWER_CON: DA4.4 R94.3 XP2.5 | length 12
  Top Layer w0.5: DA4.4@99.451,19.552 99.451,13.872 R94.3@99.331,13.752 99.331,8.614 XP2.5@100.023,7.922
SM_START_TRAILER: C8.2 DD3.48 R10.2 | length 45.1
  Top Layer w0.3: DD3.48@110.001,36.752 110.001,35.752 112.251,33.502 130.501,33.502 135.563,28.441 C8.2@135.563,15.652 C8.2@135.613,15.602
  Top Layer w0.5: C8.2@135.613,15.602 R10.2@138.259,15.602
T_G_MAX: DA3.7 R5.1 R6.1 XS4.4 | length 13.4
  Top Layer w0.5: DA3.7@65.651,70.077 67.326,70.077 69.528,72.28 R5.1@70.651,72.28 R6.1@70.651,75.017 70.651,77.717 XS4.4@69.221,79.147
T_G_MIN: DA3.5 R19.1 R20.1 XS4.2 | length 28.7
  Top Layer w0.5: DA3.5@65.651,67.537 75.036,67.537 78.601,71.102 R20.1@78.601,75.252 ; XS4.2@71.261,79.147 76.356,79.147 78.601,76.902 R20.1@78.601,75.017
TRANSP_GAS_MAX: DA3.1 DD3.11 R3.2 | length 55.5
  Top Layer w0.3: R3.2@70.651,61.992 68.776,61.992 68.311,62.457 DA3.1@65.651,62.457 64.456,62.457 64.001,62.002 64.001,61.002 66.001,59.002 96.001,59.002 105.001,50.002 DD3.11@105.001,48.052
TRANSP_GAS_MIN: DA3.2 DD3.12 R18.2 | length 57.4
  Top Layer w0.3: R18.2@70.651,65.119 69.353,65.119 67.961,63.727 DA3.2@65.651,63.727 64.461,63.727 63.501,62.767 63.501,60.795 65.794,58.502 95.794,58.502 104.501,49.795 DD3.12@104.501,48.052
TX_FTDI: DD1.11 DD2.5 DD3.30 | length 128.5
  Top Layer w0.3: DD2.5@17.951,26.127 15.626,26.127 15.251,26.502 15.251,31.002 25.041,40.792 56.185,40.792 56.896,41.504 57.81,41.504 v1(57.836,41.478) ; DD1.11@45.726,17.152 47.401,17.152 52.251,22.002 52.251,33.912 57.582,39.243 v1(59.487,39.243) 59.487,39.268 60.503,39.268 60.987,39.752 DD3.30@100.701,39.752
  Bottom Layer w0.3: v1(57.836,41.478) 58.725,40.589 58.725,40.005 v1(59.487,39.243)
US_ON_OFF: DD3.64 R36.1 | length 45.4
  Top Layer w0.3: DD3.64@111.801,46.252 125.251,46.252 133.001,54.002 140.251,61.252 140.251,66.502 R36.1@140.251,72.002
VALVE_1: DD3.62 R77.1 | length 74
  Top Layer w0.3: DD3.62@111.801,45.252 127.251,45.252 143.001,61.002 160.751,61.002 163.001,63.252 171.501,63.252 174.276,66.027 R77.1@177.151,66.027
VALVE_2: DD3.63 R76.1 | length 58.6
  Top Layer w0.3: DD3.63@111.801,45.752 126.251,45.752 143.751,63.252 158.001,63.252 160.964,66.215 R76.1@161.964,66.215
VVC: BLM1.2 C50.2 C51.2 DD2.20 R96.1 R97.1 | length 49.7
  Top Layer w0.3: DD2.20@24.551,23.527 26.426,23.527 C50.2@27.751,24.852
  Top Layer w0.5: R97.1@7.251,24.752 5.251,22.752 5.251,18.252 6.651,16.852 7.501,16.852 ; R96.1@7.476,19.652 7.501,19.628 7.501,16.852 ; v1(20.251,16.852) BLM1.2@17.976,16.852 7.501,16.852 ; v1(23.751,16.852) 28.101,16.852 31.001,19.752 C51.2@31.001,24.752 27.851,24.752 C50.2@27.751,24.852
  Bottom Layer w0.5: v1(20.251,16.852) v1(23.751,16.852)
Ак(Вк): R14.1 R15.1 XP1.6 | length 23.2
  Top Layer w2: XP1.6@226.906,5.082 229.331,5.082 231.084,6.836 R15.1@231.084,12.002
  Bottom Layer w2: R15.1@231.084,12.002 v3(244.251,12.002)
  other v3: 233.751,12.002
Ан: VD2.2 VT1.2 VT1.4 XP1.1 | length 23
  Top Layer w1: VT1.4@234.751,21.402 VT1.2@234.751,27.602
  Top Layer w1.5: XP1.1@228.291,7.922 228.291,12.792 231.651,16.152 VD2.2@231.651,17.752 231.651,19.402 233.651,21.402 VT1.4@234.751,21.402
Бк(Гк): R16.1 R17.1 XP1.4 | length 17.3
  Top Layer w2: XP1.4@219.981,7.922 R16.1@219.981,11.939
  Bottom Layer w2: v3(206.751,12.002) R16.1@219.918,12.002 R16.1@219.981,11.939
  other v3: 217.251,12.002
Бн: VD3.2 VT2.2 VT2.4 XP1.3 | length 21.6
  Top Layer w1: VT2.4@218.251,21.402 VT2.2@218.251,27.602
  Top Layer w1.5: VT2.4@218.251,21.402 220.684,18.969 VD3.2@220.684,17.752 ; VD3.2@220.751,17.686 VD3.2@220.684,17.752 ; XP1.3@222.751,7.922 222.751,12.752 220.684,14.819 220.684,15.319 VD3.2@220.684,17.752
"Верхний концевик": R7.1 R8.2 R10.1 XP1.8 | length 90.9
  Top Layer w0.3: R7.1@143.751,13.502 R7.1@143.751,13.402 ; R7.1@143.753,13.402 R7.1@143.751,13.402 ; XP1.8@221.366,5.082 217.536,1.252 165.251,1.252 156.751,9.752 145.501,9.752 143.751,11.502 R7.1@143.751,13.402
  Top Layer w0.5: R10.1@138.259,13.402 R7.1@143.751,13.402
Вн: VD4.2 VT3.2 VT3.4 XP1.2 | length 21.5
  Top Layer w1: VT3.4@226.501,21.402 VT3.2@226.501,27.602
  Top Layer w1.5: XP1.2@225.521,7.922 225.521,12.982 223.818,14.686 223.818,15.186 VD4.2@223.818,17.752 223.818,18.719 VT3.4@226.501,21.402
Гн: VD5.2 VT4.2 VT4.4 XP1.5 | length 23.9
  Top Layer w1: VT4.4@210.001,21.402 VT4.2@210.001,27.602
  Top Layer w1.5: VT4.4@210.001,21.402 211.101,21.402 212.851,19.652 VD5.2@212.851,17.752 ; VD5.2@212.851,17.252 212.851,10.402 215.331,7.922 XP1.5@217.211,7.922
"Концевик нулевого положения": R40.1 R41.2 R44.1 XS7.2 | length 18
  Top Layer w0.3: R40.1@165.751,13.252 165.751,12.002 167.001,10.752 172.496,10.752 XS7.2@175.326,7.922
  Top Layer w0.5: R44.1@160.233,13.402 R40.1@165.726,13.402
"Нижний концевик": R1.1 R2.2 R4.1 XP1.9 | length 76
  Top Layer w0.3: R1.1@154.751,13.502 154.751,12.502 165.251,2.002 215.516,2.002 XP1.9@218.596,5.082
  Top Layer w0.5: R4.1@149.246,13.402 154.651,13.402 R1.1@154.751,13.502
pads on no net: DA2.3 DA2.5 DD1.7 DD1.9 DD2.2 DD2.3 DD2.6 DD2.8 DD2.9 DD2.10 DD2.11 DD2.12 DD2.13 DD2.14 DD2.19 DD2.24 DD2.27 DD2.28 DD3.5 DD3.6 DD3.8 DD3.18 DD3.21 DD3.22 DD3.23 DD3.24 DD3.27 DD3.28 DD3.36 DD3.37 DD3.39 DD3.40 DD3.42 DD3.43 DD3.44 DD3.55 U1.2 U1.3 U1.5 U1.9 XP2.6 XP2.7 XP2.19 XP2.20 XP2.26 XP2.27 XP3.6 XS4.5 XS4.6 XS6.5 XS6.6 XS7.1 XS7.3 XS7.13 XS7.14 XS7.15 XS8.5 XS8.6 XS9.4 XS9.5 XS9.6 XS10.4 XS10.5 XS10.6 XS11.1 XS11.2 XS11.3 XS11.4 XS11.5 XS11.7 XS11.8 XS12.5 XS12.6 XS13.5 XS13.6 XS14.5 XS14.6 XS15.5 XS15.6 XS16.1 XS16.4 XS16.6 XS16.7 XS16.8 XS16.9

## Polygon pours and split planes (outlines as drawn)
GND on Bottom Layer "GND" (solid, pour order 1001): 248.751,1.002 248.751,9.252 232.501,9.252 232.501,6.002 230.001,3.502 225.501,3.502 225.501,6.752 222.751,6.752 222.751,3.502 217.751,3.502 211.501,9.752 197.751,9.752 191.751,3.752 179.001,3.752 178.251,4.752 178.251,5.752 177.501,6.502 171.251,6.502 167.001,10.752 166.251,10.752 166.251,1.002
GND on Bottom Layer "GND" (solid, pour order 1011): 219.501,89.002 219.501,69.502 224.463,64.752 248.751,64.752 248.751,89.002
GND on Bottom Layer "GND" (solid, pour order 1013): 221.001,89.002 221.001,74.002 209.001,74.002 209.001,89.002
GND on Bottom Layer "GND" (solid, pour order 1000): 217.251,89.002 217.251,74.064 217.19,74.002 204.501,74.002 201.501,71.002 198.251,67.752 193.251,67.752 193.251,89.002
GND on Bottom Layer "GND_12V_IMP" (solid, pour order 1016): 195.251,64.56 195.251,32.502 168.501,32.502 168.501,14.002 202.251,14.002 202.251,57.195
GND on Bottom Layer "GND_5V" (solid, pour order 1017): 204.597,48.502 204.597,14.002 248.751,14.002 248.751,48.502
GND on Bottom Layer "GND" (solid, pour order 1006): 1.001,89.002 193.751,89.002 193.751,35.252 167.501,35.252 167.501,1.002 1.001,1.002
GND on Top Layer "GND" (solid, pour order 1003): 248.751,1.002 248.751,9.252 232.501,9.252 232.501,6.002 230.001,3.502 225.501,3.502 225.501,6.752 222.751,6.752 222.751,3.502 217.751,3.502 211.501,9.752 197.751,9.752 191.751,3.752 179.001,3.752 178.251,4.752 178.251,5.752 177.501,6.502 171.251,6.502 167.001,10.752 166.251,10.752 166.251,1.002
GND on Top Layer "GND" (solid, pour order 1002): 193.126,89.002 248.751,89.002 248.751,66.502 233.501,81.752 225.751,74.002 199.251,74.002 193.126,67.637
+3.3V on Top Layer "3.3V" (solid, pour order 1004): 161.501,53.502 175.001,53.502 175.001,50.252 161.501,50.252
NetC2_2 on Top Layer "TPS" (solid, pour order 1015): 219.501,64.752 225.001,64.752 225.001,62.752 219.501,62.752
+24V on Top Layer "24V_TPS" (solid, pour order 1019): 231.001,61.502 242.501,61.502 242.501,65.202 238.751,65.202 238.751,63.452 231.001,63.452
GND on Top Layer "TPS" (solid, pour order 1008): 222.001,55.502 224.251,55.502 224.251,53.002 222.001,53.002 222.001,55.502
GND on Top Layer "TPS" (solid, pour order 1009): 211.476,55.452 209.226,55.452 209.226,52.952 211.476,52.952 211.476,55.452
GND on Top Layer "TPS" (solid, pour order 1010): 233.226,60.402 230.976,60.402 230.976,57.902 233.226,57.902 233.226,60.402
+12V-IMP on Top Layer "12V_TPS" (solid, pour order 1018): 216.251,63.002 216.251,58.502 211.251,58.502 211.251,56.752 208.501,56.752 208.501,63.002
NetC2_1 on Top Layer "TPS" (solid, pour order 1020): 216.251,72.502 209.251,72.502 209.251,67.952 216.251,67.952
NetC2_1 on Top Layer "TPS" (solid, pour order 1012): 219.526,65.252 221.776,65.252 221.776,67.752 219.526,67.752 219.526,65.252
NetC2_1 on Top Layer "TPS" (solid, pour order 1014): 230.501,63.002 227.976,63.002 227.976,65.752 230.501,65.752 230.501,63.002
+5V on Top Layer "5V" (solid, pour order 1005): 176.751,53.502 176.751,51.502 180.001,51.502 180.001,50.502 191.251,50.502 191.251,53.502
GND on Top Layer "GND" (solid, pour order 1007): 1.001,89.002 193.751,89.002 193.751,35.252 167.501,35.252 167.501,1.002 1.001,1.002

## Other copper
Top Layer:
  pour cut-out: 126.251,0.002 126.251,9.502 157.251,9.502 157.251,0.002
  pour cut-out: 201.251,86.002 201.251,81.752 210.751,81.752 210.751,86.002
  text "Lisun" at 2.501,11.002 h1.5 r90
Bottom Layer:
  pour cut-out: 126.251,0.002 126.251,9.252 157.251,9.252 157.251,0.002
  pour cut-out: 63.251,16.752 58.251,16.752 58.251,19.252 63.251,19.252
  pour cut-out: 201.251,86.002 201.251,81.752 210.751,81.752 210.751,86.002
  pour cut-out: 202.501,86.002 202.501,81.752 204.251,80.252 204.251,74.752 201.001,71.502 197.501,71.502 193.751,67.752 207.251,67.752 207.251,86.002
  pour cut-out: 63.251,12.252 58.251,12.252 58.251,14.752 63.251,14.752

## Silkscreen, mask and mechanical layers (free items; w line width, h text height)
Top Overlay:
  circle w0.254: c245.001,85.002 r5
  circle w0.254: c5.001,5.002 r5
  circle w0.254: c5.001,85.002 r5
  circle w0.254: c245.001,5.002 r5
  lines w0.3: 201.001,76.252 201.001,79.952 ; 206.001,76.252 206.001,79.952 ; 211.001,76.252 211.001,79.952 ; 216.001,74.252 216.001,80.002 ; 221.001,74.252 221.001,80.002 ; 226.001,74.252 226.001,79.952 ; 231.001,74.252 231.001,79.952 ; 236.001,74.252 236.001,79.952 236.001,76.252
  lines w1: 216.001,74.252 236.001,74.252 ; 200.501,49.752 200.501,72.252 243.751,72.252 243.751,49.752 200.501,49.752
  text "Converter" at 27.813,88.748 h1.5 r180
  text "PL.GAS" at 59.751,88.002 h1.5 r180
  text "TR.GAS" at 75.001,88.002 h1.5 r180
  text "EXTRACT" at 105.751,88.002 h1.5 r180
  text "OPTO2" at 119.001,88.002 h1.5 r180
  text "OPTO1" at 134.001,88.002 h1.5 r180
  text "US" at 147.001,88.002 h1.5 r180
  text "VALVE2" at 172.251,88.002 h1.5 r180
  text "VALVE1" at 186.501,88.002 h1.5 r180
  text "PRESSURE" at 91.501,87.752 h1.5 r180
  text "Current Voltage" at 32.501,86.252 h1.5 r180
  text "From" at 25.501,84.002 h1.5 r180
  text "GND" at 201.501,78.002 h1.5
  text "12V" at 206.751,78.002 h1.5
  text "IN" at 236.83,76.022 h1.5
  text "5V" at 234.251,76.002 h1.5 r90
  text "24V" at 219.251,75.252 h1.5 r90
  text "GND" at 224.501,75.252 h1.5 r90
  text "GND" at 229.501,75.252 h1.5 r90
  text "OUT" at 203.001,73.752 h1.5
  text "1" at 82.001,54.752 h1.5
  text "3=GND" at 89.751,54.252 h1.5 r90
  text "ISU  - main board REV.03" at 3.501,30.752 h1.5 r90
  text "SAM-DT" at 5.501,30.752 h1.5 r90
  text "PMT" at 244.251,2.252 h1.5 r90
  text "USB" at 18.001,1.502 h1.5
  text "COM" at 43.251,1.502 h1.5
  text "SM1150/1250" at 87.251,1.502 h1.5
  text "PMT_POWER" at 136.001,1.252 h1.5
  text "PMT" at 181.001,1.252 h1.5
  text "STEP MOTOR" at 215.501,1.252 h1.5
Bottom Overlay:
  lines w0.3: 216.001,74.202 216.001,79.902 216.001,76.202 ; 221.001,74.202 221.001,79.902 ; 226.001,74.202 226.001,79.902 ; 231.001,74.202 231.001,79.952 ; 236.001,74.202 236.001,79.952
  lines w1: 216.001,74.202 236.001,74.202
  text "IN" at 215.172,75.972 h1.5
  text "24V" at 217.751,75.952 h1.5 r270
  text "GND" at 222.501,75.202 h1.5 r270
  text "GND" at 227.501,75.202 h1.5 r270
  text "5V" at 232.751,75.202 h1.5 r270
  text "5V" at 145.415,69.52 h1.52
  text "3.3V" at 150.927,46.533 h1.52
Mechanical 1:
  lines w0.5: 0.001,90.002 0.001,0.002 250.001,0.002 250.001,90.002 0.001,90.002 ; 0.001,90.002 0.001,90.002
Mechanical 3:
  the board outline again, w0.5

## Dimensions
0.001,22.752 to 250.001,10.502 on Mechanical 2
-138.816,25.752 to -133.316,110.752 on Mechanical 2
-3.753,0.002 to 5.001,5.002 on Mechanical 2
5.001,5.002 to 0.001,-4.752 on Mechanical 2
245.001,5.002 to 250.001,5.002 on Mechanical 2
238.151,0.002 to 245.001,5.002 on Mechanical 2

## Text inside footprints (layer, text, board x,y; h text height)
C1: Top Overlay "+" at 240.301,65.752 h1.5 r270
C5: Top Overlay "+" at 198.021,65.835 h1.5 r270
C9: Top Overlay "+" at 31.026,81.502 h1.5
C12: Top Overlay "+" at 33.501,59.727 h1.5 r270
C13: Top Overlay "+" at 187.751,55.977 h1.5 r270
C16: Top Overlay "+" at 162.001,54.377 h1.5 r270
XP1: Top Overlay "1" at 230.251,7.252 h1.5; Top Overlay "5" at 214.251,7.252 h1.5; Top Overlay "9" at 216.251,4.502 h1.5; Top Overlay "6" at 228.251,4.502 h1.5
XP2: Top Overlay "1" at 112.751,7.252 h1.5; Top Overlay "14" at 111.751,4.502 h1.5; Top Overlay "25" at 75.251,4.502 h1.5; Top Overlay "13" at 74.251,7.252 h1.5
XS7: Top Overlay "15" at 192.001,4.502 h1.5; Top Overlay "9" at 171.501,4.502 h1.5; Top Overlay "8" at 193.751,7.252 h1.5; Top Overlay "1" at 170.251,7.252 h1.5
XS11: Top Overlay "1" at 134.251,7.252 h1.5; Top Overlay "5" at 148.751,7.252 h1.5; Top Overlay "6" at 135.001,4.502 h1.5; Top Overlay "9" at 147.501,4.502 h1.5
XS16: Top Overlay "6" at 39.251,4.502 h1.5; Top Overlay "9" at 51.251,4.502 h1.5; Top Overlay "5" at 52.751,7.252 h1.5; Top Overlay "1" at 38.251,7.252 h1.5